# Altium PCB CH32V205RCT-R0.PcbDoc (part 1 of 2)
Units mil, origin at the board's own origin, x right, y up, seen from the top; angles counter-clockwise.
Board outline 3070.87 x 2755.91 mil, 2 copper layers (Top Layer, Bottom Layer); 61 components, 79 nets, 328 pads, 508 vias.
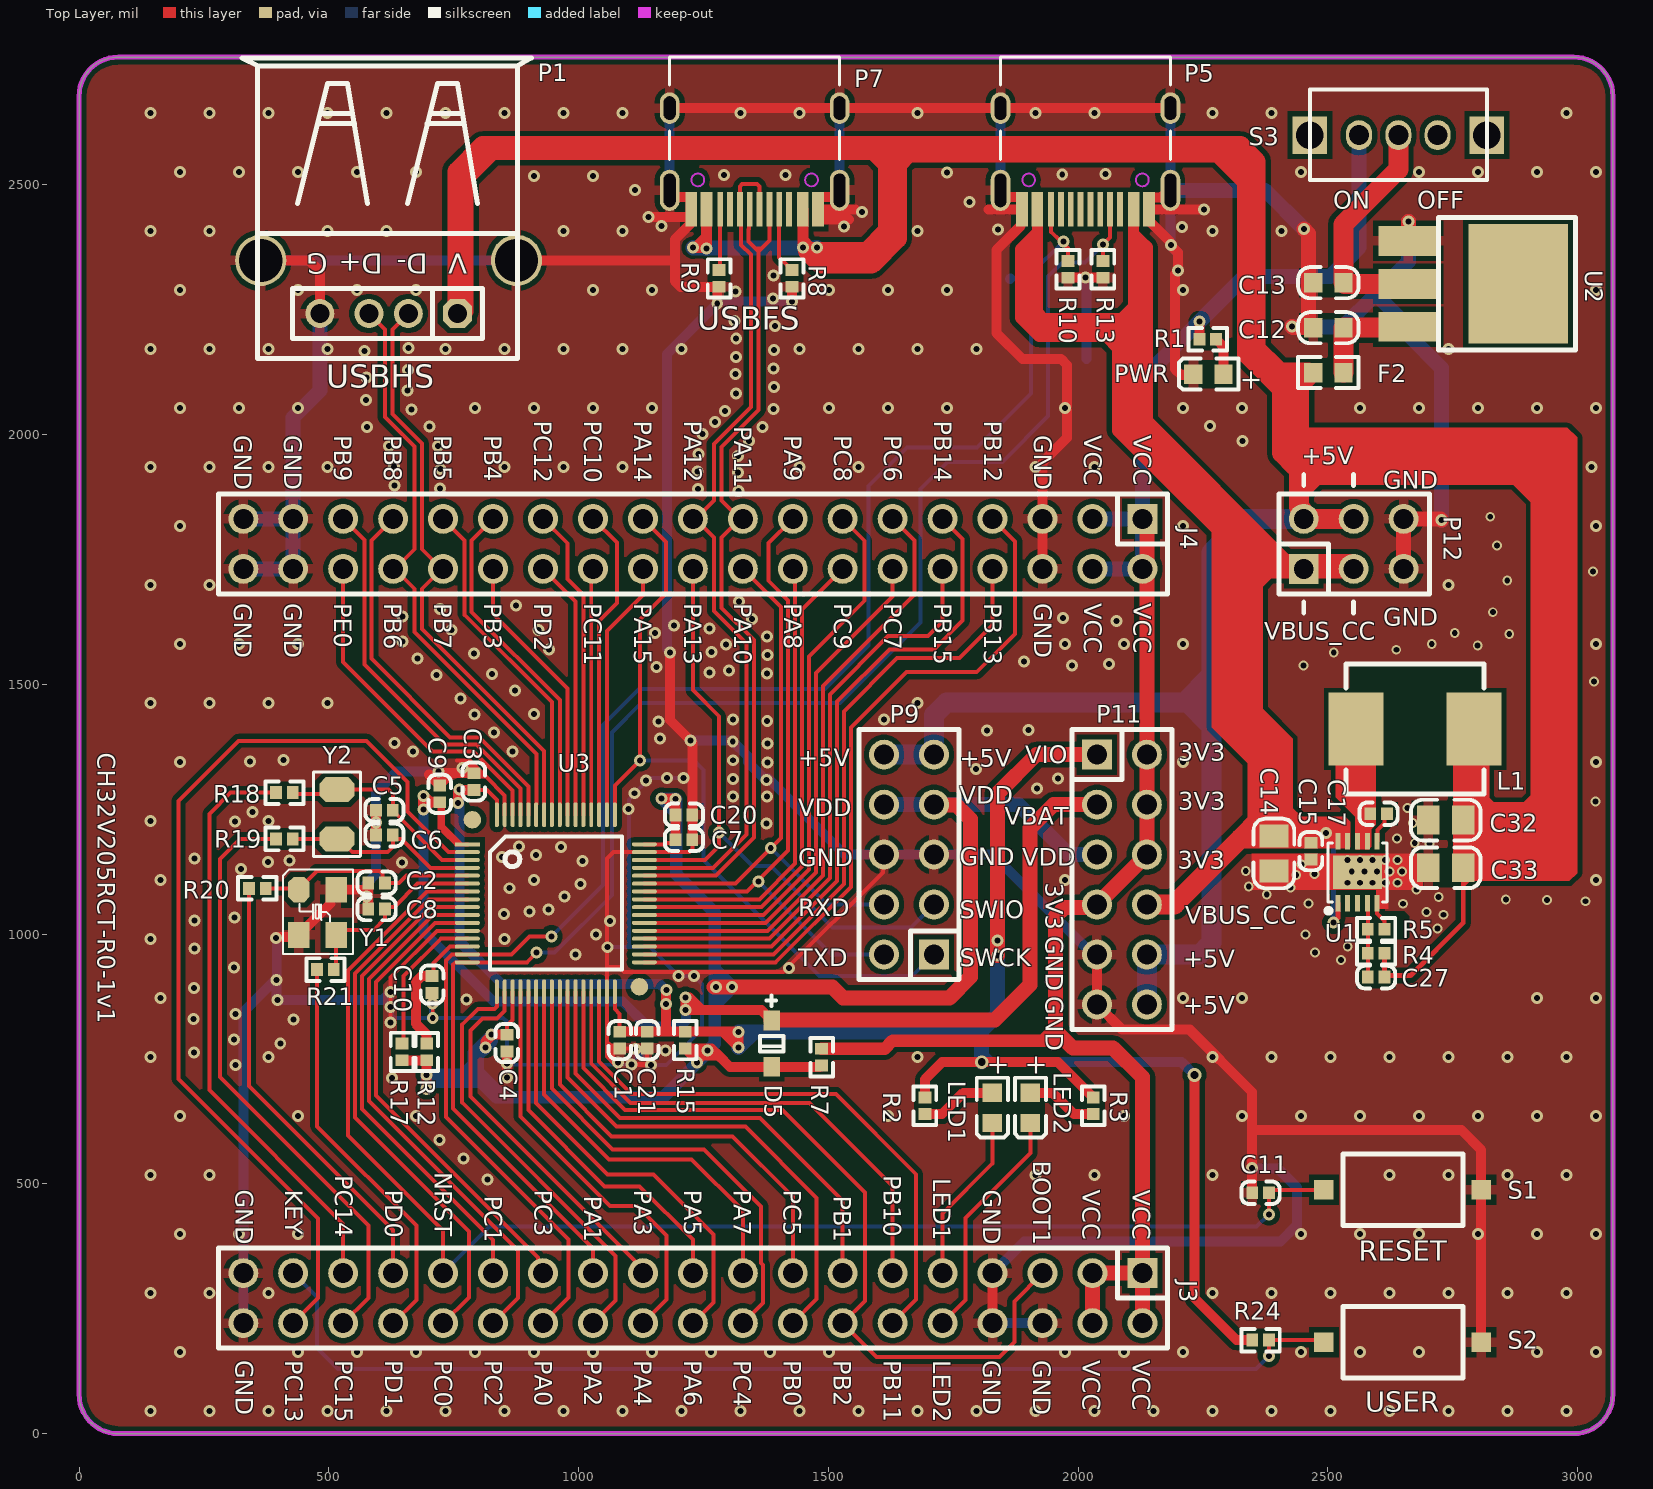
[diagram p0: Top Layer view]
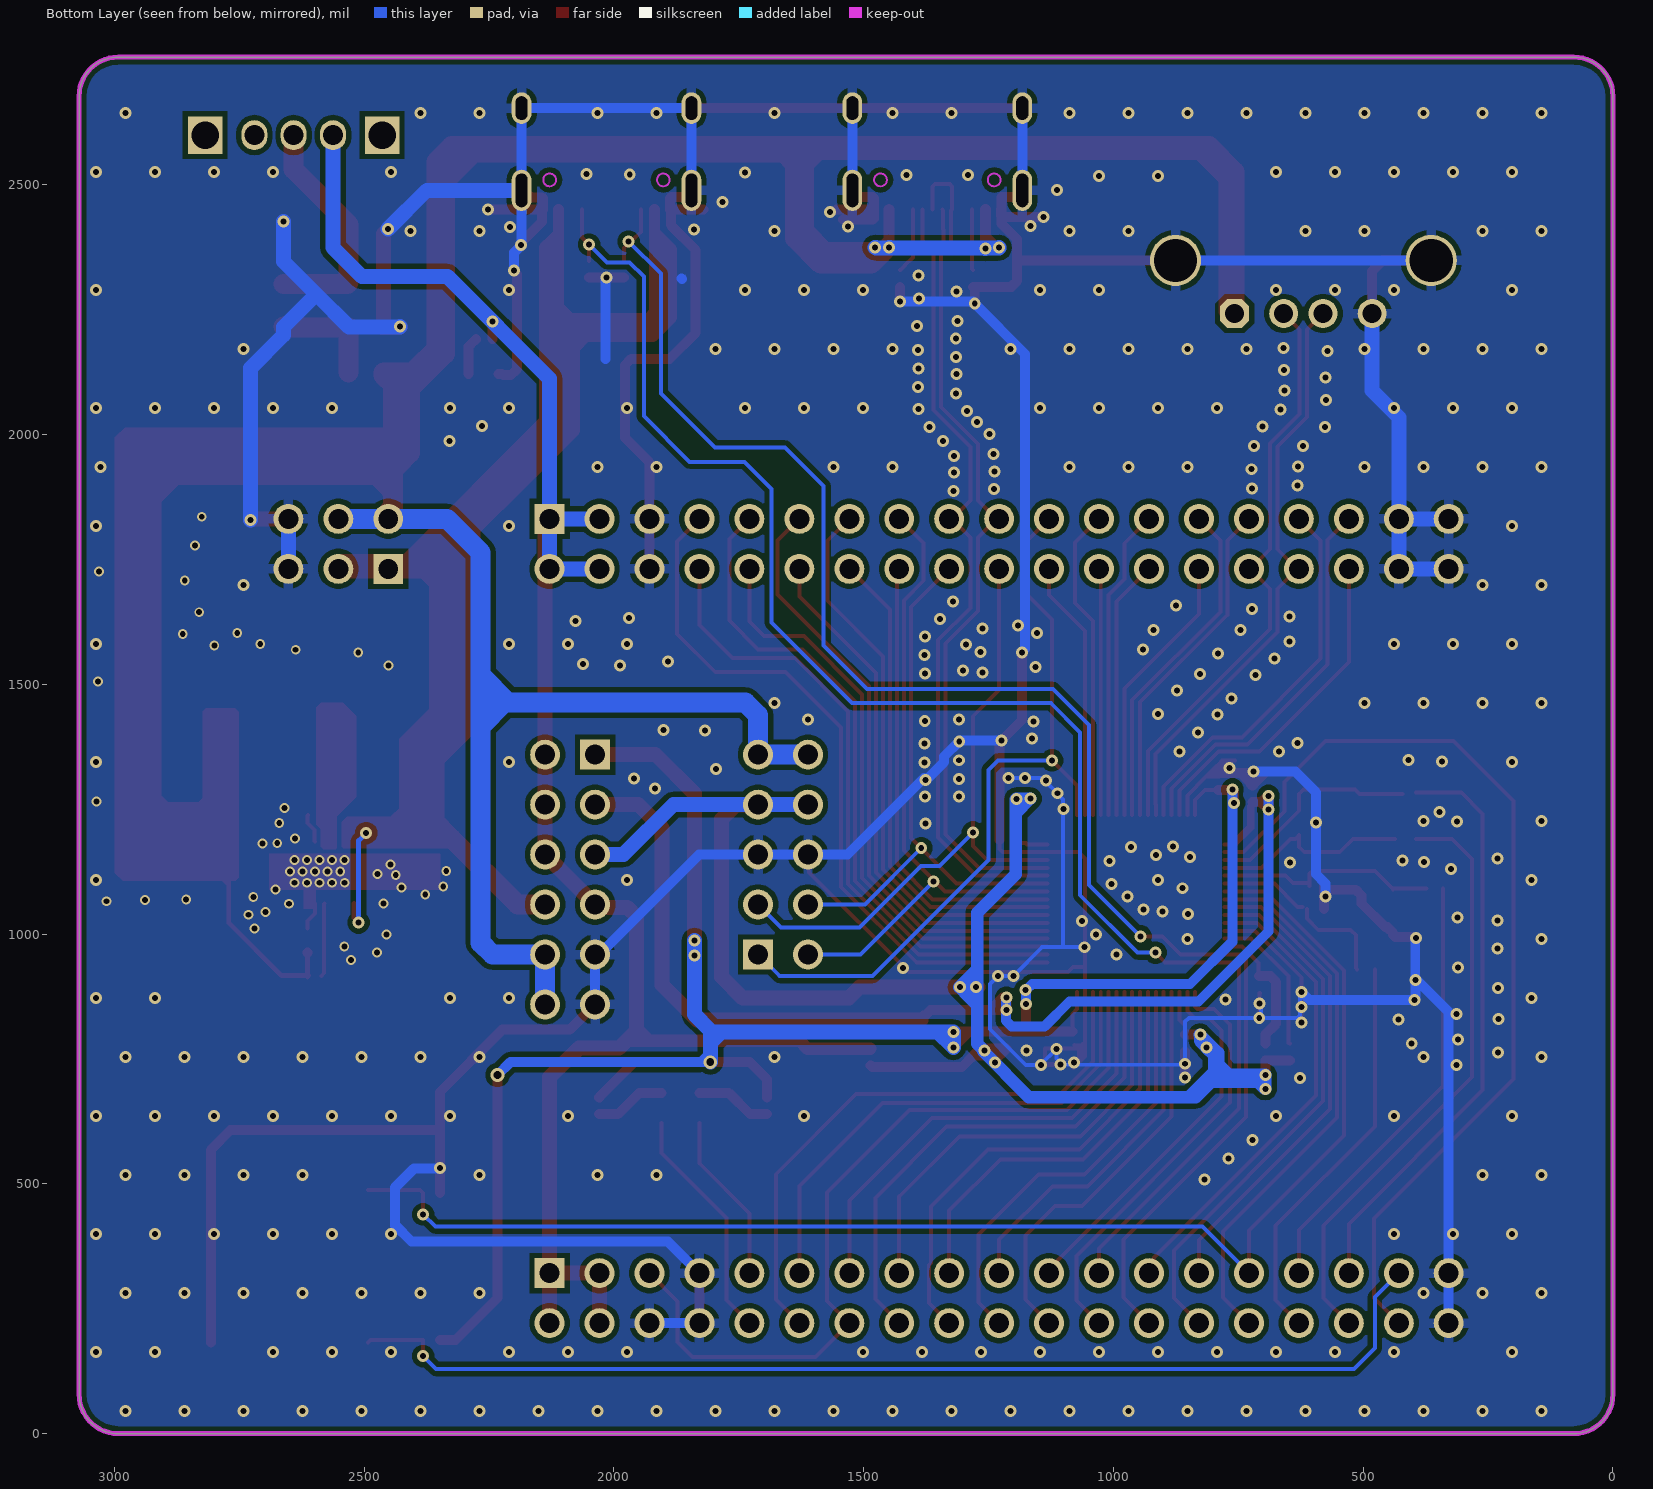
[diagram p1: Bottom Layer view, seen from below]

## Layer stack, top to bottom
Top Solder: solder mask 0.4, Solder Resist, Dk 3.5
Top Layer: signal copper 1.4
Dielectric 1: dielectric 12.6, FR-4, Dk 4.8
Bottom Layer: signal copper 1.4
Bottom Solder: solder mask 0.4, Solder Resist, Dk 3.5

## Board outline
0,78.74 0,2677.17 cw(c78.74,2677.17) 78.74,2755.91 2992.13,2755.91 cw(c2992.13,2677.17) 3070.87,2677.17 3070.87,78.74 cw(c2992.13,78.74) 2992.13,0 78.74,0 cw(c78.74,78.74)

## Design rules (kind name [scope] priority, off if disabled: settings)
Clearance Clearance_1 [InPolygon] p1: gap=10 ignorepadtopadclearanceinfootprint=FALSE
Clearance [All] p2: gap=6 ignorepadtopadclearanceinfootprint=FALSE except(8: Arc-Via Track-Via SMDPad-Via THPad-Via Via-Via Via-Fill Via-Poly Via-Region Via-Hole)
ComponentClearance [All] p1 off: gap=10 collisioncheckmode=3 verticalgap=10 showdistances=FALSE
DiffPairsRouting [All] p1: maxlimit=10 minlimit=7 mostfreqgap=8 toplayer_minwidth=6 toplayer_maxwidth=15 toplayer_prefwidth=8 bottomlayer_minwidth=6 bottomlayer_maxwidth=15 bottomlayer_prefwidth=8 maxuncoupledlength=500
MinimumSolderMaskSliver [All] p1 off: minsoldermaskwidth=10
PolygonConnect PolygonConnect_1 [IsVia] p1: connectstyle=Direct reliefconductorwidth=10 reliefentries=4 polygonreliefangle="90 Angle" airgapwidth=10
PolygonConnect [All] p2: connectstyle=Relief reliefconductorwidth=20 reliefentries=4 polygonreliefangle="90 Angle" airgapwidth=10
RoutingVias [All] p1: holewidth=16 width=28 viastyle="Through Hole" minholewidth=11.81 minwidth=19.68 maxholewidth=28 maxwidth=50
SilkToSilkClearance [All] p1 off: silktosilkclearance=10
SilkToSolderMaskClearance [IsPad] p1 off: minsilkscreentomaskgap=10 clearancetoexposedcopper=TRUE
SolderMaskExpansion [All] p1: expansion=2 istentingtop=FALSE
Width [All] p1: maxlimit=100 minlimit=5 preferedwidth=10
25 further rules are at their usual default settings.

## Classes and differential pairs
differential pair NewDifferentialPair1: +PA11 -PA12
differential pair "PB6 PB7": +PB6 -PB7

## Components (designator, comment, footprint, x,y, rotation, side; value= is the part's Value field where it differs from the comment)
C1 "0.1uF" 0402_C 1082.46,771.21 r180 top
C2 "22pF" 0402_C 578.93,1102.49 r90 top
C3 "0.1uF" 0402_C 790.46,1322.14 r0 top
C4 "0.1uF" 0402_C 856.6,765.34 r180 top
C5 "12pF" 0402_C 628.09,1248.23 r270 top
C6 "12pF" 0402_C 628.09,1198.4 r270 top
C7 "0.1uF" 0402_C 1227.83,1188.79 r270 top
C8 "22pF" 0402_C 578.93,1050.5 r90 top
C9 "0.1uF" 0402_C 722,1264.07 r180 top
C10 "0.1uF" 0402_C 706.71,915.92 r0 top
C11 "0.1uF" 0402_C 2348.57,482.24 r90 top
C12 "10uF" 0603_C 2531.31,2214.06 r180 top
C13 "10uF" 0603_C 2531.31,2304.06 r180 top
C14 "NC(22uF/35V)" 0805_C 2392.02,1126.53 r90 top
C15 "NC(0.1uF)" 0402_C 2466.22,1149.5 r180 top
C17 "NC(100nF)" 0402_C 2618.34,1240.94 r270 top
C20 "4.7uF" 0402_C 1194.37,1238.79 r90 top
C21 "4.7uF" 0402_C 1137.46,771.21 r180 top
C27 "NC(68pF)" 0402_C 2613.34,914.15 r270 top
C32 "NC(22uF)" 0805_C 2701.01,1228.33 r0 top
C33 "NC(22uF)" 0805_C 2701.01,1132.9 r0 top
D5 "B0520WS" SOD-323 1386.8,827.14 r270 top
F2 "500mA" 0603 2470.68,2124.06 r0 top
J3 "Header 19X2" IDC38-2.54mm 2128.86,321.33 r270 top
J4 "Header 19X2" IDC38-2.54mm 2128.86,1831.33 r270 top
L1 "NC(4.7uH/5A)" IND-SMD_L7.0-W6.6 2674.62,1410.73 r0 top
LED1 "LED1   blue" 0603+ 1828.23,682.43 r270 top
LED2 "LED2  blue" 0603+ 1904.5,682.43 r270 top
P1 "USBHS" USBAF 757.66,2242.44 r180 top
P5 "USBPD" TYPE-C-Receptacle-2.0 2014.85,2450.82 r180 top
P7 "TYPE-C" TYPE-C-Receptacle-2.0 1352.54,2450.82 r180 top
P9 "LINK" IDC10-2.54mm 1711.51,1359.23 r180 top
P11 "HEADER 6x2" IDC12-2.54mm 2037.77,1359.23 r0 top
P12 "HEADER 3x2" IDC6-2.54mm 2451.79,1731.33 r0 top
PWR "POWER  red" 0603+ 2291.31,2121.02 r180 top
R1 "1K" 0402 2276.31,2191.02 r180 top
R2 "1K" 0402 1693.43,673.15 r270 top
R3 "1K" 0402 2030.28,673.15 r270 top
R4 "NC(15K)" 0402 2579.87,961.9 r0 top
R5 "NC(4.7K)" 0402 2613.34,1009.66 r180 top
R7 "0Ω" 0402 1486.65,770.43 r270 top
R8 "NC(5.1K)" 0402 1427.3,2295.98 r90 top
R9 "NC(5.1K)" 0402 1281.3,2295.98 r90 top
R10 "NC(5.1K)" 0402 1979.85,2347.51 r270 top
R12 "0Ω" 0402 696.03,780.86 r270 top
R13 "NC(5.1K)" 0402 2049.85,2347.51 r270 top
R15 "0Ω" 0402 1213.77,804.68 r270 top
R17 "0Ω" 0402 646.72,747.51 r90 top
R18 "NC(0Ω)" 0402 428.05,1283.28 r180 top
R19 "NC(0Ω)" 0402 394.59,1190.61 r0 top
R20 "NC(0Ω)" 0402 340.33,1091.64 r0 top
R21 "NC(0Ω)" 0402 476.67,929.07 r0 top
R24 "10K" 0402 2382.04,187.28 r180 top
S1 "RESET" SMD_6.1x3.65x2.5mm-KEY 2492.11,488.17 r0 top
S2 "USER" SMD_6.1x3.65x2.5mm-KEY 2492.11,182.96 r0 top
S3 "SW" SW1 2641.13,2599.52 r180 top
U1 "NC(CH2024Q)" DFN10_3X3 2559.32,1123.68 r0 top
U2 "1117-3.3V" SOT-223 2661.23,2387.95 r270 top
U3 "CH32V205R" LQFP64_7X7 777.42,1179.95 r270 top
Y1 "8MHz" XT3225 440.12,1088.89 r270 top
Y2 "32.768k" FC-135 516.59,1289.24 r270 top

## Footprints (in the part's own frame and the unit in brackets; to place one, negate y for a bottom-side part, rotate by r counter-clockwise, add the part's x,y. Pads: shape width x height; smd on the part's side, far side on the other; paste and mask are expansions set on the pad)
0402 [mm]
  rect 0.6x0.65 smd mask+0.051: 1(0,0) 2(0.85,0)
  silkscreen extent -0.55,-0.58 1.4,0.57
0402_C [mm]
  rect 0.65x0.6 smd mask+0.051: 1(0,0) 2(0,-0.85)
  silkscreen extent -0.58,-1.4 0.57,0.55
0603 [mm]
  rect 0.93x0.98 smd: 1(0,0) 2(1.54,0)
  silkscreen extent -0.76,-0.79 2.3,0.79
0603+ [mm]
  rect 0.93x0.98 smd: 1(0,0) 2(1.54,0)
  silkscreen extent -0.76,-0.79 2.27,0.79
0603_C [mm]
  rect 0.93x0.98 smd mask+0.051: 1(0,0) 2(1.54,0)
  silkscreen extent -0.76,-0.79 2.31,0.79
0805_C [mm]
  rect 1.16x1.47 smd mask+0.051: 1(0,0) 2(1.78,0)
  silkscreen extent -0.88,-1.04 2.66,1.03
DFN10_3X3 [mm]
  rect 2.5x1.7 smd mask+0.051: 0(0,0)
  rect 0.25x0.85 smd mask+0.051: 1(-1,-1.575) 2(-0.5,-1.575) 3(0,-1.575) 4(0.5,-1.575) 5(1,-1.575) 6(1,1.575) 7(0.5,1.575) 8(0,1.575) 9(-0.5,1.575) 10(-1,1.575)
  silkscreen extent -1.57,-2.05 1.5,1.5
FC-135 [mil]
  oct 50x70 smd: 1(0,0) 2(98.43,0)
  silkscreen extent -35,-47 133,47
IDC6-2.54mm [mil]
  rect 60x60 hole 40: 1(0,0)
  round 60 hole 40: 2(0,100) 3(100,0) 4(100,100) 5(200,0) 6(200,100)
  silkscreen extent -50,-50 252,150
IDC10-2.54mm [mil]
  rect 60x60 hole 40: 1(0,400)
  round 60 hole 40: 2(100,400) 3(0,300) 4(100,300) 5(0,200) 6(100,200) 7(0,100) 8(100,100) 9(0,0) 10(100,0)
  silkscreen extent -50,-50 150,450
IDC12-2.54mm [mil]
  rect 60x60 hole 40: 1(0,0)
  round 60 hole 40: 2(100,0) 3(0,-100) 4(100,-100) 5(0,-200) 6(100,-200) 7(0,-300) 8(100,-300) 9(0,-400) 10(100,-400) 11(0,-500) 12(100,-500)
  silkscreen extent -50,-550 150,50
IDC38-2.54mm [mil]
  rect 60x60 hole 40: 1(0,0)
  round 60 hole 40: 2(100,0) 3(0,-100) 4(100,-100) 5(0,-200) 6(100,-200) 7(0,-300) 8(100,-300) 9(0,-400) 10(100,-400) 11(0,-500) 12(100,-500) 13(0,-600) 14(100,-600) 15(0,-700) 16(100,-700) 17(0,-800) 18(100,-800) 19(0,-900) 20(100,-900) 21(0,-1000) 22(100,-1000) 23(0,-1100) 24(100,-1100) 25(0,-1200) 26(100,-1200) 27(0,-1300) 28(100,-1300) 29(0,-1400) 30(100,-1400) 31(0,-1500) 32(100,-1500) 33(0,-1600) 34(100,-1600) 35(0,-1700) 36(100,-1700) 37(0,-1800) 38(100,-1800)
  silkscreen extent -50,-1850 150,50
IND-SMD_L7.0-W6.6 [mm]
  rect 2.8x3.7 smd: 1(-3,0) 2(3,0)
  silkscreen extent -3.5,-3.3 3.5,3.3
LQFP64_7X7 [mm]
  round 0.889 smd: 0(-1.246,0.254) 0(7.246,8.746)
  rect 0.203x1.27 smd mask+0.051: 1(0,0)
  oval 0.203x1.27 smd mask+0.051: 2(0.4,0) 3(0.8,0) 4(1.2,0) 5(1.6,0) 6(2,0) 7(2.4,0) 8(2.8,0) 9(3.2,0) 10(3.6,0) 11(4,0) 12(4.4,0) 13(4.8,0) 14(5.2,0) 15(5.6,0) 16(6,0) 33(6,9) 34(5.6,9) 35(5.2,9) 36(4.8,9) 37(4.4,9) 38(4,9) 39(3.6,9) 40(3.2,9) 41(2.8,9) 42(2.4,9) 43(2,9) 44(1.6,9) 45(1.2,9) 46(0.8,9) 47(0.4,9) 48(0,9)
  oval 1.27x0.203 smd mask+0.051: 17(7.5,1.5) 18(7.5,1.9) 19(7.5,2.3) 20(7.5,2.7) 21(7.5,3.1) 22(7.5,3.5) 23(7.5,3.9) 24(7.5,4.3) 25(7.5,4.7) 26(7.5,5.1) 27(7.5,5.5) 28(7.5,5.9) 29(7.5,6.3) 30(7.5,6.7) 31(7.5,7.1) 32(7.5,7.5) 49(-1.5,7.5) 50(-1.5,7.1) 51(-1.5,6.7) 52(-1.5,6.3) 53(-1.5,5.9) 54(-1.5,5.5) 55(-1.5,5.1) 56(-1.5,4.7) 57(-1.5,4.3) 58(-1.5,3.9) 59(-1.5,3.5) 60(-1.5,3.1) 61(-1.5,2.7) 62(-1.5,2.3) 63(-1.5,1.9) 64(-1.5,1.5)
  silkscreen extent -0.39,1.15 6.36,7.86
SMD_6.1x3.65x2.5mm-KEY [mm]
  rect 1x1 smd: 1(0,0) 2(8,0)
  silkscreen extent 0.98,-1.83 7.08,1.83
SOD-323 [mm]
  rect 1x0.83 smd: 1(0,0) 2(2.36,0)
  silkscreen extent -1.28,-0.6 1.58,0.6
SOT-223 [mil]
  rect 60x120 smd: 1(0,0) 2(86,0) 3(172,0)
  rect 240x200 smd: ""(86,220)
  silkscreen extent -47,60 219,335
SW1 [mm]
  rect 1.75x1.9 hole 1.4: 0(-4.5,0) 0(4.5,0)
  oval 1.321x1.524 hole 1.016: 1(0,0) 2(-2,0) 3(2,0)
  silkscreen extent -4.51,-2.31 4.5,2.29
TYPE-C-Receptacle-2.0 [mm]
  oval 1x2.1 hole 0.6 slot 1.7 at 90 deg: 0(-4.32,-0.97) 0(4.32,-0.97)
  oval 1x1.6 hole 0.6 slot 1.2 at 90 deg: 0(-4.32,-5.15) 0(4.32,-5.15)
  rect 0.6x1.75 smd mask+0.051: A1(-3.225,0) A4(-2.45,0) B1(3.225,0) B4(2.45,0)
  rect 0.3x1.75 smd mask+0.051: A5(-1.25,0) A6(-0.25,0) A7(0.25,0) A8(1.25,0) B5(1.75,0) B6(0.75,0) B7(-0.75,0) B8(-1.75,0)
  Keep-Out Layer circle w0.1: c2.89,-1.5 r0.325
  Keep-Out Layer circle w0.1: c-2.89,-1.5 r0.325
  silkscreen extent -4.32,-7.75 4.32,-2.55
USBAF [mm]
  round 2.6 hole 2.2: 0(-3,-2.7) 0(10,-2.7)
  oct 1.473x1.473 hole 0.965: 1(0,0)
  round 1.473 hole 0.965: 2(2.5,0) 3(4.5,0) 4(7,0)
  silkscreen extent -3.75,-12.99 10.95,2.29
XT3225 [mm]
  oct 1.3x1.1 smd: 1(0,0)
  rect 1.3x1.1 smd: 2(2.3,0) 3(2.3,1.9) 4(0,1.9)
  silkscreen extent -1.02,-0.8 3.27,2.74

## Part data
C1 C3 C4 C5 C6 C7 C9 C10 C11: library part Cap, "Capacitor"
C2 C8 C12 C13 C15 C20 C21: library part CAP, "Capacitor"
C14 C27 C32 C33: library part "0603 100nF (104) 10% 50V", "贴片电容", Package=0603, SuppliersPartNumber=C14663, ComponentLink1Description=供应商链接, ComponentLink1URL=http://www.szlcsc.com/product/details_15331.html, Supplier=LC
C17: library part "0603 1uF (105) 10% 50V", "贴片电容", Package=0603, SuppliersPartNumber=C15849, ComponentLink1Description=供应商链接, ComponentLink1URL=http://www.szlcsc.com/product/details_16531.html, Supplier=LC
D5: library part DIODE, "Diode"
F2: library part FUSE1, "Fuse"
J3 J4: "Header, 19-Pin, Dual row", LatestRevisionDate=17-Jul-2002, LatestRevisionNote="Re-released for DXP Platform.", Publisher="Altium Limited"
L1: library part INDUCTOR
LED1 LED2 PWR: library part LED0, "Typical INFRARED GaAs LED", LatestRevisionDate=08-Jul-2005, LatestRevisionNote="Mech Layer 1 removed.", PackageReference=LED-0, Published=8-Jun-2000, Publisher="Altium Limited"
P1: library part USB, "USB Port"
P5 P7: library part TYPE-C1
P9: library part "HEADER 5x2", "Header, 5-Pin, Dual row"
P11: "Header, 6-Pin, Dual row"
P12: "Header, 3-Pin, Dual row"
R1 R2 R3: library part "Res Semi", "Semiconductor Resistor"
R4 R5: library part RES
R7 R8 R9 R10 R12 R13 R15 R17 R18 R19 R20 R21 R24: library part Res2, "Resistor"
S1 S2: library part KEY1
U1: library part CH2024Q, "Step-Down DC-DC Converter, 28V input, FB 1.2V, 3A output"
U3: "RISC-V MCU, 192MHz, USB_480M, USB FS, PD, PIOC, ADC, TKEY, 2*OPA, 2*CMP"
Y1 Y2: library part XTAL, "Crystal Oscillator", LatestRevisionDate=17-Jul-2002, LatestRevisionNote="Re-released for DXP Platform.", PackageReference=R38, Published=8-Jun-2000, Publisher="Altium Limited"
  Y1: PackageDescription="Crystal, Thru-Hole; 2 Leads; Body 3.1 x 8.2 mm (Dia.xH)"

## Via types
v1: diameter 24, hole 12, Top Layer to Bottom Layer, tented both sides, 451 vias
v2: diameter 19.68, hole 11.81, Top Layer to Bottom Layer, tented both sides, 55 vias
v3: diameter 27.56, hole 15.75, Top Layer to Bottom Layer, tented both sides, 2 vias

## Nets (pads, with @x,y where several pads share a name; then routed paths per layer and width w, separated by ;. In a path a pad name is that pad's centre, name@x,y a point inside that pad or via, vN(x,y) a via of type N, cw(c..) or ccw(c..) an arc to the next point about the centre after c; other vN are vias at no path point)
3V3: J3.1 J3.2 J3.3 J3.4 J4.1 J4.2 J4.3 J4.4 P11.2 P11.4 P11.6 P11.7 R1.2 R7.1 S3.3 | length 3971.4
  Top Layer w20: R1.2@2242.84,2191.02 v1(2242.84,2226.01)
  Top Layer w25: R7.1@1486.65,770.43 1612.54,770.43 1628.82,786.71 1968.82,786.71 ; 1930.15,786.71 1955.18,811.74
  Top Layer w30: J3.4@2028.86,221.33 J3.3@2028.86,321.33 J3.1@2128.86,321.33 ; J3.2@2128.86,221.33 J3.1@2128.86,321.33 ; J4.2@2128.86,1731.33 2128.86,1723.21 J4.2@2137.77,1714.3 ; J4.1@2128.86,1831.33 2137.77,1822.42 J4.2@2137.77,1714.3 ; J3.1@2128.86,321.33 2128.86,713.59 2070.12,772.32 1989.53,772.32 1955.18,806.68 1955.18,811.74 1955.18,1035.92 1972.75,1053.49 2032.03,1053.49 P11.7@2037.77,1059.23 P11.6@2137.77,1159.23 P11.4@2137.77,1259.23 P11.2@2137.77,1359.23 J4.2@2137.77,1714.3
  Bottom Layer w30: J4.4@2028.86,1731.33 J4.2@2128.86,1731.33 J4.1@2128.86,1831.33 ; J4.3@2028.86,1831.33 J4.1@2128.86,1831.33 ; S3.3@2562.39,2599.52 2562.39,2374.1 2504.76,2316.47 2333.31,2316.47 2128.86,2112.02 J4.1@2128.86,1831.33
+5V: C27.1 C32.2 C33.2 F2.1 L1.2 P1.1 P7.A4 P7.B4 P9.9 P9.10 P11.10 P11.12 P12.2 P12.4 R4.2 | length 10212.4
  Top Layer w10: C27.1@2611.87,917 C27.1@2613.34,917 ; C27.1@2613.34,914.15 C27.1@2613.34,917 ; R4.2@2613.34,961.9 C27.1@2613.34,917 ; C33.2@2771.09,1132.9 2771.09,1099.25 ; C33.2@2792.81,1120.96 2771.09,1099.25 ; C27.1@2613.34,917 2665.33,917 2771.09,1022.77 2771.09,1099.25
  Top Layer w20: R4.2@2613.34,961.9 2613.34,962.61 R4.2@2613.74,963
  Top Layer w22: P1.1@776.42,2243.09 778.94,2245.61 778.94,2509.58 830.23,2560.86 1587.58,2560.86 1610.87,2537.58 ; P7.B4@1256.08,2450.82 1256.08,2395.3 ; P7.A4@1448.99,2450.82 1448.99,2389.18 ; 1583.75,2577.34 1610.87,2550.23 ; 1653.4,2577.34 1628.27,2552.21 ; 1256.08,2395.3 1235.51,2374.73 1229.11,2374.73 v1(1228.73,2374.35) 1254.52,2374.35 1255.96,2372.91 v1(1256.5,2372.91) 1256.5,2373.45 1256.08,2373.87 1256.08,2395.3 ; 1448.99,2389.18 1463.37,2374.8 ; 1448.99,2389.18 1448.99,2375.93 1449.57,2375.34 v1(1449.57,2374.8) ; v1(1449.57,2374.8) 1465.39,2358.99 1467.95,2358.99 1588.03,2358.99 1628.27,2399.23 1628.27,2552.21 ; v1(1449.57,2374.8) 1463.37,2374.8 ; 1463.37,2374.8 v1(1477.17,2374.8) 1574.44,2374.8 1610.87,2411.23 1610.87,2537.58 ; 1610.87,2537.58 1610.87,2550.23 ; 1610.87,2550.23 1610.87,2577.34 1628.27,2559.94 1628.27,2552.21
  Top Layer w40: P1.1@757.66,2242.44 757.66,2526.73 808.26,2577.34 1583.75,2577.34 1610.87,2577.34 1653.4,2577.34 2295.13,2577.34 ; v1@1459.2,2367.74 1467.95,2358.99 1484.71,2342.22 1586.79,2342.22 1637.06,2392.5 1637.06,2541.29 1660.62,2564.85 2280.69,2564.85 2338.56,2506.98 2338.56,2161.34 2408.37,2091.53 2408.37,2011.43 ; 2397.47,2129.77 2355.4,2171.84 2355.4,2547.04 2325.11,2577.34 2295.13,2577.34 ; 2434.56,1936.86 2408.37,1963.05 2408.37,2011.43 ; 2446.34,1888.06 2446.34,1889.62 2485.5,1928.78 ; P12.4@2551.79,1831.33 P12.2@2451.79,1831.33 2447.97,1835.15 2447.97,1849.29 2442.47,1854.79 2442.47,1977.33 ; 2295.13,2577.34 2347.24,2525.23 2347.24,2162.77 2385.95,2124.06 2414.21,2124.06 ; 2408.37,2011.43 2442.47,1977.33 ; 2414.21,2124.06 2442.47,2095.8 ; 2414.21,2124.06 2461.23,2124.06 2461.23,2117.95 2442.47,2099.2 2442.47,2095.8 ; 2442.47,1977.33 2442.47,2095.8
  Bottom Layer w30: v1(1228.73,2374.35) 1229.11,2373.97 1230.53,2373.97 v1@1258.1,2373.96 ; v1(1256.5,2372.91) 1257.04,2372.91 v1@1258.1,2373.96 ; v1(1449.57,2374.8) 1449.19,2374.42 1447.78,2374.42 v1@1447.32,2373.96 ; v1(1477.17,2374.8) 1476.79,2374.42 1475.37,2374.42 1474.92,2373.96 v1@1447.32,2373.96 ; v1@1258.1,2373.96 v1@1447.32,2373.96
  Bottom Layer w40: P9.10@1611.51,1359.23 P9.9@1711.51,1359.23 1711.51,1438.33 1736.92,1463.74 2212.11,1463.74 ; P11.12@2137.77,859.23 P11.10@2137.77,959.23 2243.24,959.23 2266.67,982.66 2266.67,1416.19 ; P12.4@2551.79,1831.33 P12.2@2451.79,1831.33 2334.1,1831.33 2266.67,1763.89 2266.67,1518.29 ; 2212.11,1463.74 2219.12,1463.74 ; 2212.11,1463.74 2266.67,1518.29 ; 2219.12,1463.74 2262.36,1463.74 2266.67,1459.43 ; 2219.12,1463.74 2266.67,1416.19 ; 2266.67,1416.19 2266.67,1459.43 ; 2266.67,1459.43 2266.67,1518.29
BOOT1: J3.5 J3.14 U3.28 | length 1644.4
  Top Layer w8: U3.28@1009.71,884.68 1009.71,731.76 1093.16,648.3 1408.26,648.3 1573.3,483.26 1573.3,265.77 J3.14@1528.86,221.33 1596.24,153.94 1842.31,153.94 1872.28,183.92 1872.28,264.75 J3.5@1928.86,321.33
CC1: J3.26 P5.B5 R10.1 U3.15 | length 3315.5
  Top Layer w8: J3.26@928.86,221.33 979.83,272.29 979.83,389.1 734.92,634.01 734.92,947.58 746.82,959.48 U3.15@777.42,959.48 866.01,959.48 902.26,995.72 v1(945.86,995.72) ; P5.B5@1945.95,2450.82 1945.95,2406.09 1962.39,2389.66 1967.61,2389.66 v1(1970.67,2386.6) 1970.67,2383.09 1979.85,2373.91 R10.1@1979.85,2347.51
  Bottom Layer w8: v1(945.86,995.72) 1048.91,1098.78 1048.91,1418.48 1121.41,1490.98 1493.19,1490.98 1580.1,1577.88 1580.1,1896.73 1657.66,1974.29 1798.05,1974.29 1906.23,2082.47 1906.23,2322.16 v1(1970.67,2386.6)
CC2: J3.23 P5.A5 R13.1 U3.16 | length 3252
  Top Layer w8: v1(915.54,962.86) 896.42,943.73 U3.16@777.42,943.73 753.61,943.73 748.92,939.05 748.92,650.77 1028.86,370.83 J3.23@1028.86,321.33 ; R13.1@2049.85,2347.51 v1(2049.85,2380.44) 2064.06,2394.65 P5.A5@2064.06,2450.82
  Bottom Layer w8: v1(915.54,962.86) 951.65,962.86 1066.66,1077.87 1066.66,1404.06 1125.53,1462.92 1523.27,1462.92 1684.11,1623.77 1684.11,1891.25 1738.31,1945.45 1848.59,1945.45 1940.24,2037.1 1940.24,2316.09 1969.08,2344.94 2014.35,2344.94 v1(2049.85,2380.44)
FB: C27.2 R4.1 R5.2 U1.4 | length 148.4
  Top Layer w8: U1.4@2579.01,1061.67 2579.93,1060.75 2579.93,921.8 C27.2@2585.66,916.08